# EAGLE board motor_shield__SD_v2.0 (EAGLE 8.0.0)
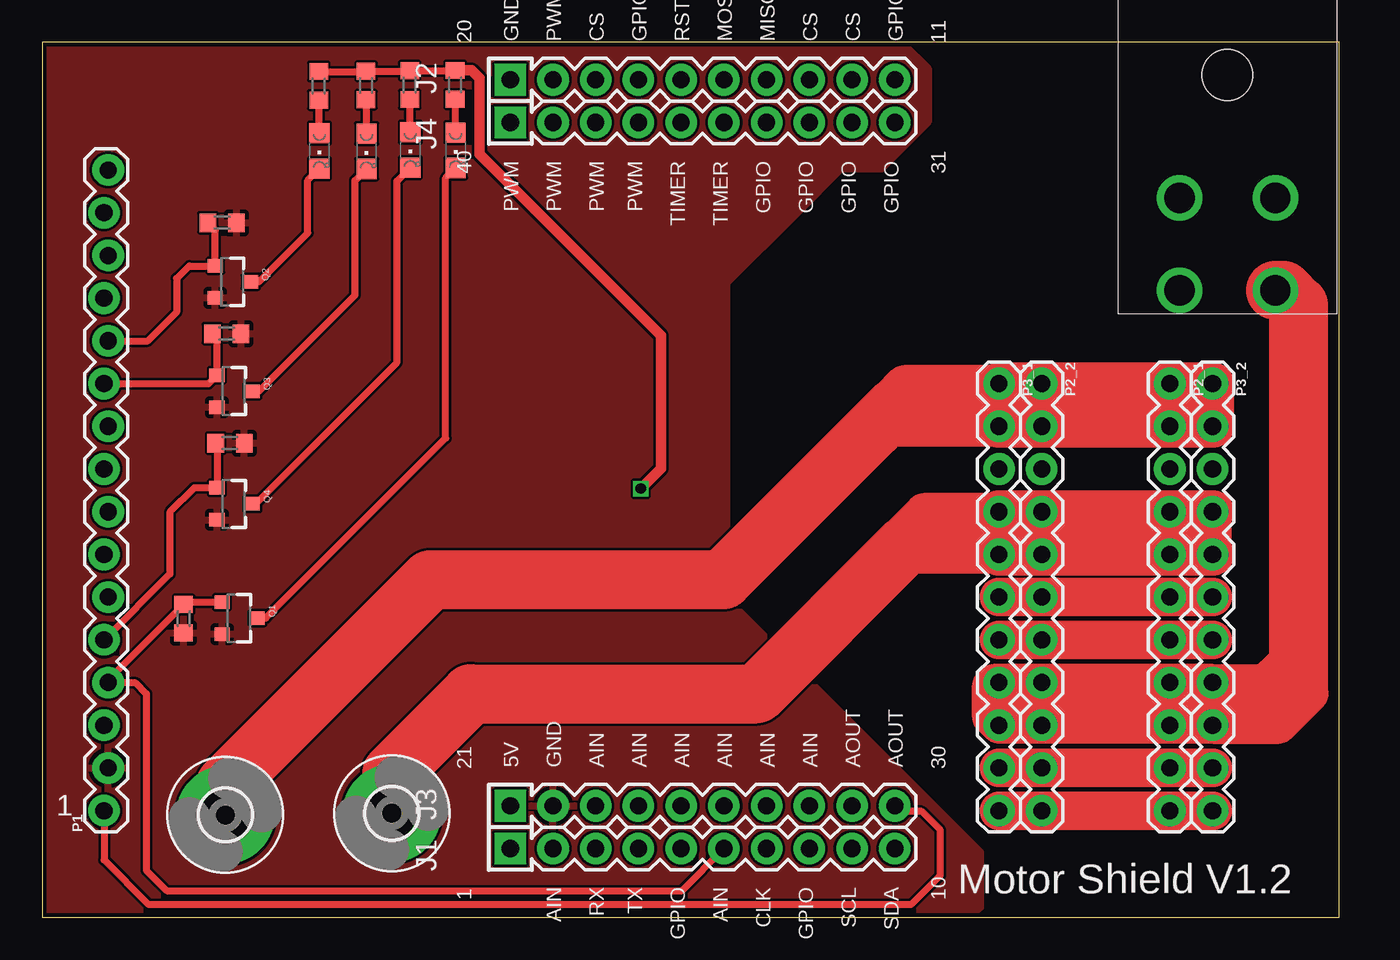
[diagram p0: board, top side]
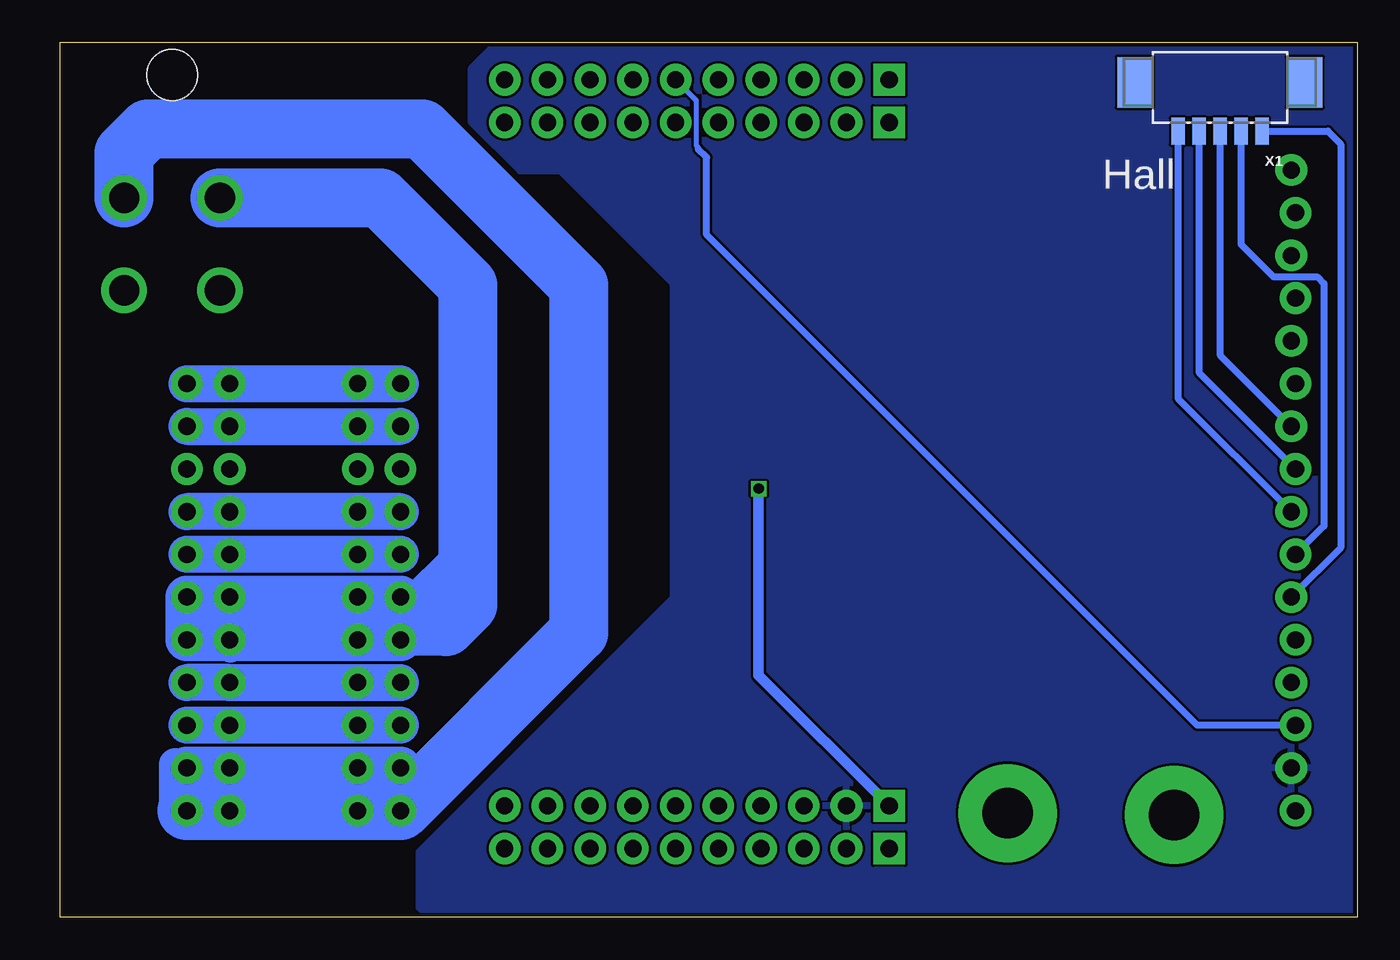
[diagram p1: board, bottom side, seen from below]

Size 77.14 x 52.06 mm. Coordinates in mm from the lower left corner, seen from the top.
Outline: 0,0 77.14,0 77.14,52.06 0,52.06 0,0
Copper layers (1*16): Top 0.035mm / dielectric 1.5mm / Bottom 0.035mm
Design rules "SeeedStudio_2layer_DRU_no_angle_20140221": minimum track width 6mil, minimum drill 12mil, track to track 6mil, track to pad 6mil, pad to pad 6mil, via to via 6mil, smd to smd 0mil, copper to edge 10mil, drill to drill 10mil, minimum pad ring 10mil, minimum via ring 6mil, stop-mask expansion 2mil, vias tented up to drill 100mil, thermal gap 10mil

## Footprints (pad centres in the part's own frame; a part is rotated, then mirrored left to right if it is on the bottom)
4X10-BOOSTERPACK = drill 1.016 pad 1.88 square: 1 0,10.16; 20 45.72,10.16; 21 2.54,10.16; 40 43.18,10.16 | drill 1.016 pad 1.88: 2 0,7.62; 3 0,5.08; 4 0,2.54; 5 0,0; 6 0,-2.54; 7 0,-5.08; 8 0,-7.62; 9 0,-10.16; 10 0,-12.7; 11 45.72,-12.7; 12 45.72,-10.16; 13 45.72,-7.62; 14 45.72,-5.08; 15 45.72,-2.54; 16 45.72,0; 17 45.72,2.54; 18 45.72,5.08; 19 45.72,7.62; 22 2.54,7.62; 23 2.54,5.08; 24 2.54,2.54; 25 2.54,0; 26 2.54,-2.54; 27 2.54,-5.08; 28 2.54,-7.62; 29 2.54,-10.16; 30 2.54,-12.7; 31 43.18,-12.7; 32 43.18,-10.16; 33 43.18,-7.62; 34 43.18,-5.08; 35 43.18,-2.54; 36 43.18,0; 37 43.18,2.54; 38 43.18,5.08; 39 43.18,7.62
MOLEX4CON = drill 1.8: 1 3.67,21.4; 2 3.67,15.9; 3 9.37,21.4; 4 9.37,15.9 | hole 3: 6.52,8.6
3,0-PAD = drill 3 pad 5.842: B3,0 0,0
CHIPLED_0805 = smd 1.2 x 1.2: A 0,-1.05; C 0,1.05
1X16_LOCK = drill 1.016 pad 1.88: 1 0,0.127; 2 2.54,-0.127; 3 5.08,0.127; 4 7.62,-0.127; 5 10.16,0.127; 6 12.7,-0.127; 7 15.24,0.127; 8 17.78,-0.127; 9 20.32,0.127; 10 22.86,-0.127; 11 25.4,0.127; 12 27.94,-0.127; 13 30.48,0.127; 14 33.02,-0.127; 15 35.56,0.127; 16 38.1,-0.127
1X11 = drill 1.016 pad 1.88: 1 0,0; 2 2.54,0; 3 5.08,0; 4 7.62,0; 5 10.16,0; 6 12.7,0; 7 15.24,0; 8 17.78,0; 9 20.32,0; 10 22.86,0; 11 25.4,0
SOT23-3 = smd 0.8 x 0.9: 1 -0.95,-1; 2 0.95,-1; 3 0,1.1
R0603 = smd 1 x 1.1: 1 -0.85,0; 2 0.85,0
PB-53261-05 = smd 0.8 x 1.6: 1 -2.5,1.1; 2 -1.25,1.1; 3 0,1.1; 4 1.25,1.1; 5 2.5,1.1 | smd 2.1 x 3: MNT1 -5.05,-1.8; MNT2 5.05,-1.8

## Placement (x,y rotation side)
A1  [4X10-BOOSTERPACK]  38,4.1 90 top
C1  MOLEX4CON  [MOLEX4CON]  77,58.7 180 top
H1  MOUNT-PAD-ROUND3.0  [3,0-PAD]  20.8,6.2 0 top
H3  MOUNT-PAD-ROUND3.0  [3,0-PAD]  10.9,6.1 0 top
LED1  [CHIPLED_0805]  24.59,45.63 180 top
LED2  [CHIPLED_0805]  19.29,45.57 180 top
LED3  [CHIPLED_0805]  16.49,45.59 180 top
LED4  [CHIPLED_0805]  21.89,45.65 180 top
P1  [1X16_LOCK]  3.81,6.35 90 top
P2_1  [1X11]  67.06,31.75 270 top
P2_2  [1X11]  59.44,31.75 270 top
P3_1  [1X11]  56.9,31.75 270 top
P3_2  [1X11]  69.6,31.75 270 top
Q1  MMBT2222A  [SOT23-3]  11.7,17.8 270 top
Q2  MMBT2222A  [SOT23-3]  11.3,37.8 270 top
Q3  MMBT2222A  [SOT23-3]  11.4,31.3 270 top
Q4  MMBT2222A  [SOT23-3]  11.4,24.6 270 top
R1  220  [R0603]  24.56,49.52 90 top
R2  220  [R0603]  19.26,49.48 90 top
R3  220  [R0603]  16.46,49.46 90 top
R4  220  [R0603]  21.86,49.5 90 top
R5  1000  [R0603]  8.41,17.77 90 top
R6  1000  [R0603]  10.71,41.31 180 top
R7  1000  [R0603]  11.18,28.21 180 top
R8  1000  [R0603]  10.98,34.71 180 top
X1  [PB-53261-05]  8.18,47.86 180 bottom

## Library data of the parts
A1 = EAGLE_BoosterPack_Library
C1 = TREC1
H1 H3 = holes
LED1-LED4 R1-R8 = adafruit
P1 P2_1 P2_2 P3_1 P3_2 = SparkFun-Connectors
Q1-Q4 = SparkFun-DiscreteSemi; PROD_ID: TRANS-08049
X1 = pel_molex

## Nets
*INHIBIT: P1.5 Q4.1 R7.2
+5V: A1.21 R1.2 R2.2 R3.2 R4.2
CURRENT_MONITOR: A1.6 P1.4 Q1.1 R5.2
CURRENT_REF: P1.11 Q3.1 R8.2
DIRECTION: A1.15 P1.3
FAULT_OUT: P1.12 Q2.1 R6.2
GND: A1.22 P1.2 Q1.2 Q2.2 Q3.2 Q4.2 R5.1 R6.1 R7.1 R8.1
GND_HALL: P1.7 X1.2
HALL1: P1.8 X1.5
HALL2: P1.9 X1.4
HALL3: P1.10 X1.3
HIGH_VOL: H3.B3,0 P2_1.1 P2_1.2 P2_2.1 P2_2.2 P3_1.1 P3_1.2 P3_2.1 P3_2.2
MOTOR_A: C1.2 P2_1.10 P2_1.11 P2_2.10 P2_2.11 P3_1.10 P3_1.11 P3_2.10 P3_2.11
MOTOR_B: C1.1 P2_1.8 P2_1.9 P2_2.8 P2_2.9 P3_1.8 P3_1.9 P3_2.8 P3_2.9
MOTOR_C: C1.4 P2_1.6 P2_1.7 P2_2.6 P2_2.7 P3_1.6 P3_1.7 P3_2.6 P3_2.7
N$1: LED1.A R1.1
N$2: LED2.A R2.1
N$10: LED3.A R3.1
N$11: LED4.A R4.1
N$15: LED1.C Q1.3
N$16: LED2.C Q3.3
N$30: LED3.C Q2.3
N$41: LED4.C Q4.3
N$46: A1.1
N$47: A1.2
N$48: A1.3
N$49: A1.4
N$50: A1.5
N$52: A1.7
N$53: A1.8
N$54: A1.9
N$55: A1.10
N$58: A1.23
N$59: A1.24
N$60: A1.25
N$61: A1.26
N$62: A1.27
N$63: A1.28
N$64: A1.29
N$66: A1.40
N$67: A1.39
N$69: A1.37
N$70: A1.36
N$71: A1.35
N$72: A1.34
N$73: A1.33
N$74: A1.32
N$75: A1.31
N$76: A1.20
N$77: A1.19
N$79: A1.17
N$80: A1.16
N$82: A1.14
N$83: A1.13
N$84: A1.12
N$85: A1.11
PWM: A1.30 P1.1
PWR_GND: H1.B3,0 P2_1.4 P2_1.5 P2_2.4 P2_2.5 P3_1.4 P3_1.5 P3_2.4 P3_2.5
V+_HALL: P1.6 X1.1

## Tracks (layer width: path | path; a pad name or v marks a point on that pad's centre or on a via)
*INHIBIT
  Top 0.406: P1.5 7.6,20.43 7.6,24.1 9.05,25.55 Q4.1 10.4,28.14 R7.2
+5V  (via drill 0.6)
  Top 0.406: R3.2 19.26,50.31 R2.2 21.86,50.33 R4.2 24.56,50.35 R1.2
  Top 0.61: R1.2 25.53,50.37 26,49.9 26,45.4 36.8,34.6 36.8,26.7 v35.6,25.5
  Bottom 0.61: v35.6,25.5 35.6,14.4 A1.21
CURRENT_MONITOR
  Top 0.406: Q1.1 8.54,18.75 R5.2 3.94,14.14 P1.4 5.53,13.97 6.2,13.3 6.2,2.8 7.4,1.6 38.04,1.6 A1.6
CURRENT_REF
  Top 0.406: R8.2 10.4,34.44 Q3.1 9.9,31.75 P1.11
DIRECTION
  Bottom 0.305: 39.2,45.7 39.2,45.8 39.3,45.9 39.3,48.58 A1.15
  Bottom 0.406: P1.3 9.53,11.43 38.7,40.6 38.7,45.2 39.2,45.7
FAULT_OUT
  Top 0.406: P1.12 6.29,34.29 8,36 8,38 8.75,38.75 Q2.1 10.3,40.87 R6.2
GND
  pour Bottom: 0.1,51.9 51.3,51.9 52.7,50.5 52.7,47.3 49.8,44.4 47.4,44.4 40.7,37.7 40.7,19 55.8,3.9 55.8,0.6 55.2,0 0.1,0 0,0.1 0,51.8
  pour Top: 0.1,52 51.2,52 52.7,50.5 52.7,47.3 49.9,44.5 47.5,44.5 44.9,41.9 40.7,37.7 40.7,19 55.8,3.9 55.8,0.6 55.2,0 -0.1,0 -0.1,51.8
GND_HALL
  Bottom 0.406: X1.2 6.93,40.03 5,38.1 2.4,38.1 2,37.7 2,23.27 P1.7
HALL1
  Bottom 0.406: X1.5 10.68,30.87 P1.8
HALL2
  Bottom 0.406: X1.4 9.43,32.41 P1.9
HALL3
  Bottom 0.406: X1.3 8.18,33.45 P1.10
HIGH_VOL
  Top 2.184: P3_1.1 51.25,31.75 50.4,30.9 | 49.5,29.1 59.33,29.1 P2_2.2
  Top 2.54: P2_1.1 P3_1.1 P3_1.2 P2_2.2 | P2_2.2 P3_2.2 P3_2.1 P2_1.1 | P2_2.1 P2_2.2 | P2_1.2 P2_1.1
  Top 3.51: H3.B3,0 10.9,7.9 23.1,20.1 40.5,20.1 49.5,29.1 50.8,30.4 57.3,30.4 57.8,30.9 63.7,30.9 64.2,30.4 64.7,30.4 64.8,30.5 69,30.5
  Bottom 2.184: P3_2.1 P3_1.1 | P3_2.2 P3_1.2
MOTOR_A
  Top 2.3: P3_1.10 P3_2.10 | P3_1.11 P3_2.11
  Bottom 1.93: P3_2.11 69.6,8.4 70.3,9.1 70.3,6.1 70.2,6
  Bottom 2.3: 59.44,6.06 P2_2.10 P2_2.11 | P2_1.11 P3_2.10 P2_1.10
  Bottom 2.54: P3_1.11 P2_1.11 P3_2.11 | P3_1.10 P2_2.10 P3_2.10
  Bottom 3.51: P3_2.11 P3_1.11 46.3,16.95 46.3,37.6 55.6,46.9 71.9,46.9 73.33,45.47 C1.2
MOTOR_B
  Top 1.676: P2_2.8 58.44,13.97 56.4,11.93 | P3_1.8 P2_2.9 | P2_1.9 P3_2.9
  Top 2.184: 73.8,15 72.77,13.97 P3_2.8 P3_1.8 56.57,13.97 56.4,13.8 56.4,11.93 | 56.4,11.93 P3_1.9 P2_2.9 P3_2.9 73.53,11.43 75.4,13.3 | 56.4,11.93 69.13,11.93 69.9,12.7
  Top 3.51: C1.1 73.8,37.3 74.7,36.4 74.7,13.6 73.8,12.7 69.9,12.7 57.3,12.7
  Bottom 0.406: P3_2.8 P2_1.8
  Bottom 2.184: P3_1.8 P2_1.8 P3_2.8 | P3_1.9 P3_2.9
MOTOR_C
  Top 2.3: P3_1.6 P3_2.6 | P3_1.7 P3_2.7
  Bottom 1.676: P2_1.7 P3_2.7 | P3_2.6 69.6,18.6 67,16 67,16.1 68.1,17.2
  Bottom 1.93: 53.8,20 54.75,19.05 P3_1.6 55.85,19.05 53.9,21
  Bottom 2.54: 66.5,16.51 P3_2.7 P3_2.6 P2_1.6 | P2_2.7 66.5,16.51 | P3_1.7 P2_2.7 | P2_1.6 P3_1.6 P2_2.7 | P2_1.6 67.06,17.07 66.5,16.51 | P2_2.6 P2_2.7 | P2_1.6 P2_1.7
  Bottom 3.51: C1.4 58.1,42.8 52.9,37.6 52.9,18.6 54.2,17.3 60.9,17.3 61,17.2 68.1,17.2 68.7,17.8
N$1
  Top 0.406: R1.1 24.56,46.71 LED1.A
N$2
  Top 0.406: R2.1 19.26,46.65 LED2.A
N$10
  Top 0.406: R3.1 16.46,46.67 LED3.A
N$11
  Top 0.406: R4.1 21.86,46.73 LED4.A
N$15
  Top 0.406: LED1.C 24,43.98 24,28.5 13.3,17.8 Q1.3
N$16
  Top 0.406: LED2.C 18.6,43.82 18.6,37 12.9,31.3 Q3.3
N$30
  Top 0.406: LED3.C 15.8,43.84 15.8,40.7 12.9,37.8 Q2.3
N$41
  Top 0.406: LED4.C 21.1,43.8 21.1,33 12.7,24.6 Q4.3
PWM
  Top 0.406: P1.1 3.68,3.42 6.3,0.8 51.7,0.8 53.4,2.5 53.4,5.2 52.3,6.3 51.04,6.3 A1.30
PWR_GND
  Top 2.184: P3_1.4 52.43,24.13 50.8,22.5 | P3_2.4 P3_2.5
  Top 2.54: P2_2.5 P3_1.5 P3_1.4 P2_2.4 | P2_1.5 P2_2.5 | P3_2.5 P2_1.5 | P2_2.4 P3_2.4 68.08,22.62 P2_1.5 | P2_2.4 P2_2.5 | P2_1.4 P2_1.5
  Top 3.51: H1.B3,0 20.8,8.6 25.5,13.3 42.5,13.3 51.4,22.2 67.67,22.2 68.08,22.62
  Bottom 2.184: P3_1.4 P3_2.4 | P3_1.5 P3_2.5
V+_HALL
  Bottom 0.406: X1.1 1.76,46.76 1,46 1,21.99 P1.6

## Text on the board
tPlace: 1 | Motor Shield V1.2
bPlace: Hall